# Altium PCB ESP32_RelayControl.pcbdoc (part 1 of 2)
Units mil, origin at the board's own origin, x right, y up, seen from the top; angles counter-clockwise.
Board outline 4712.62 x 5124.54 mil, 4 copper layers (Top Layer, GND, Power, Bottom Layer); 107 components, 102 nets, 393 pads, 226 vias.
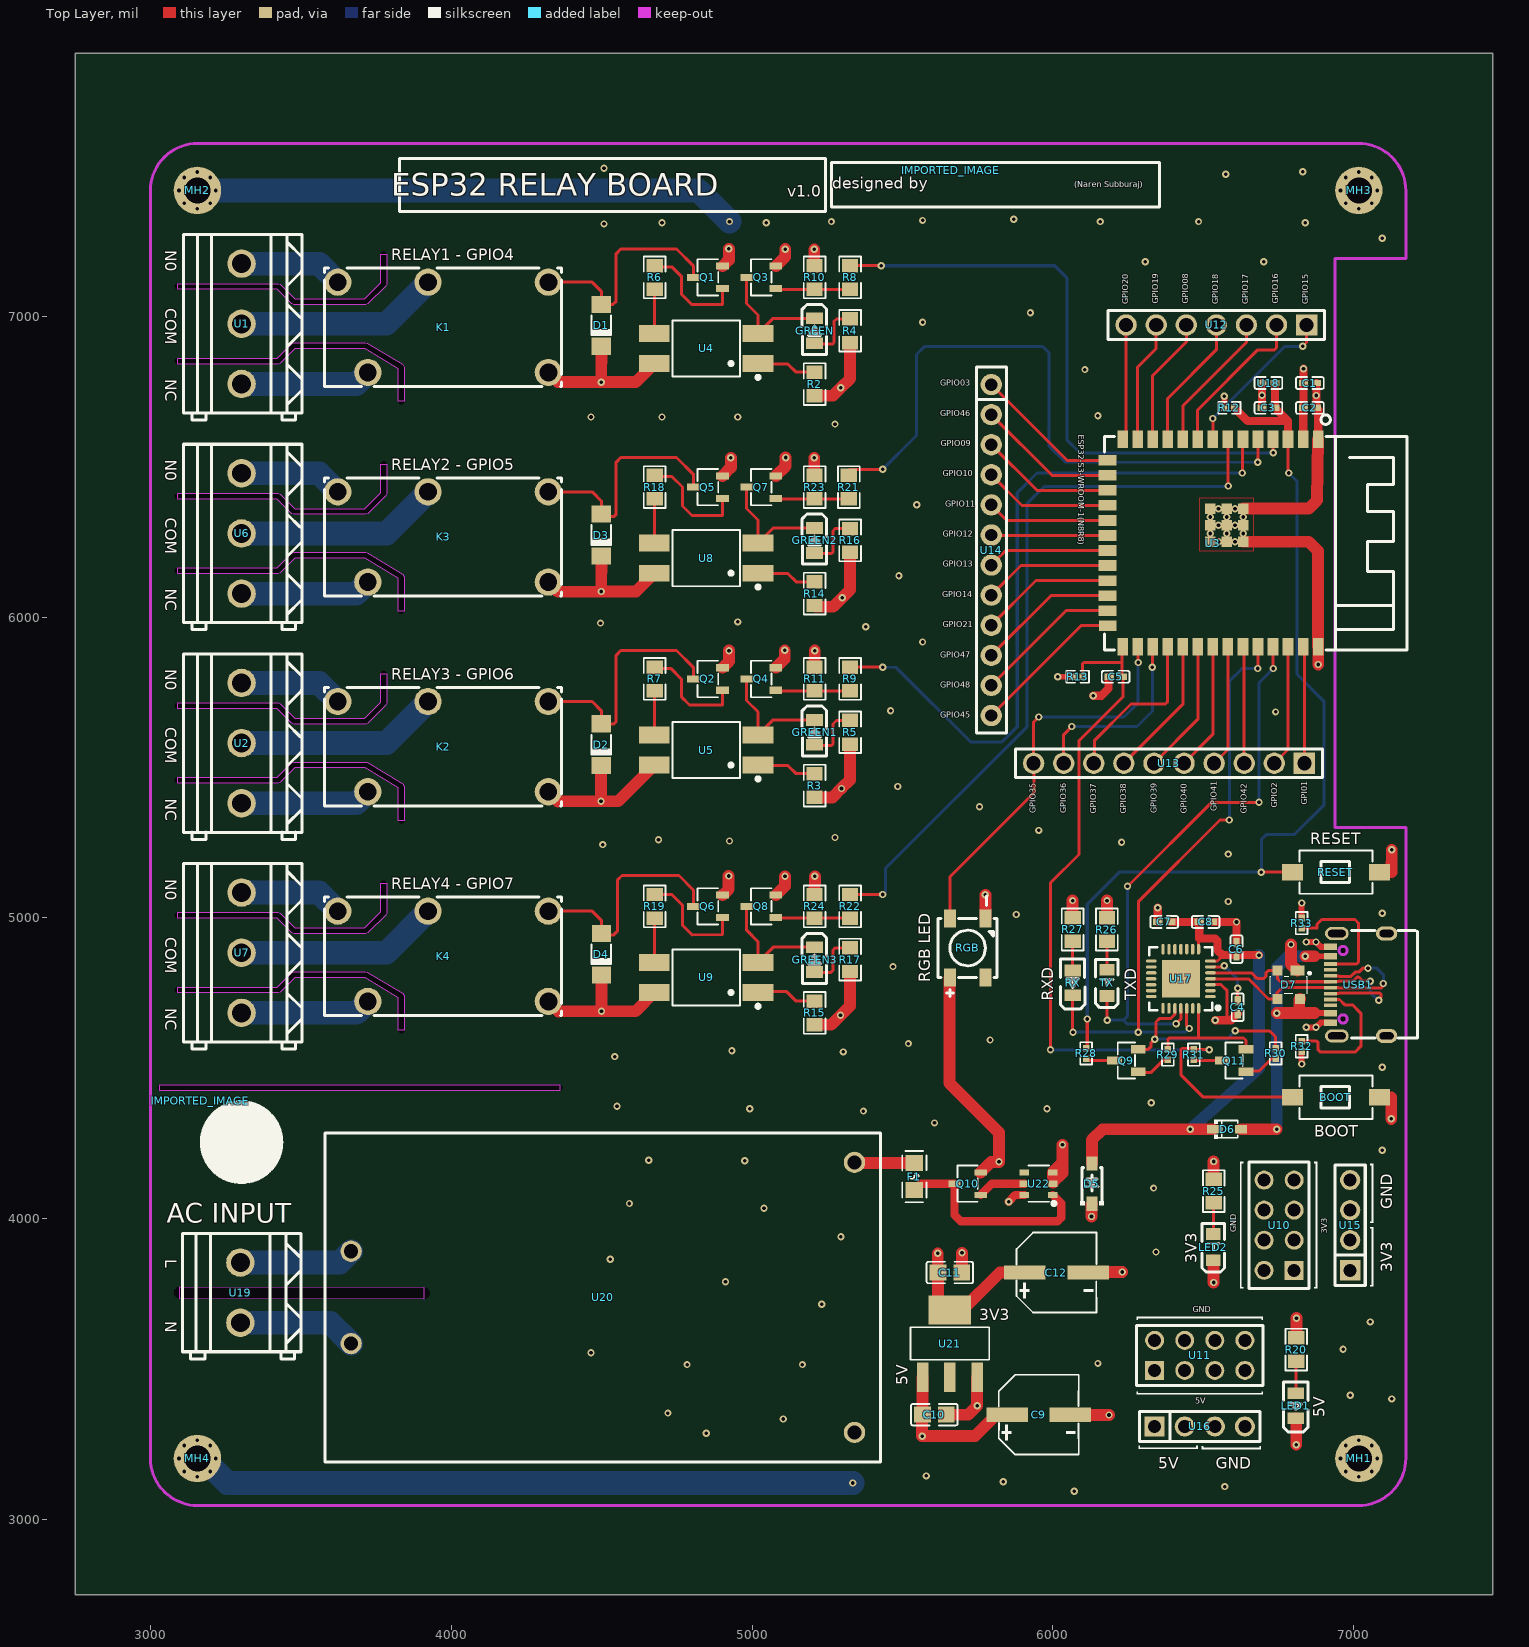
[diagram p0: Top Layer view]
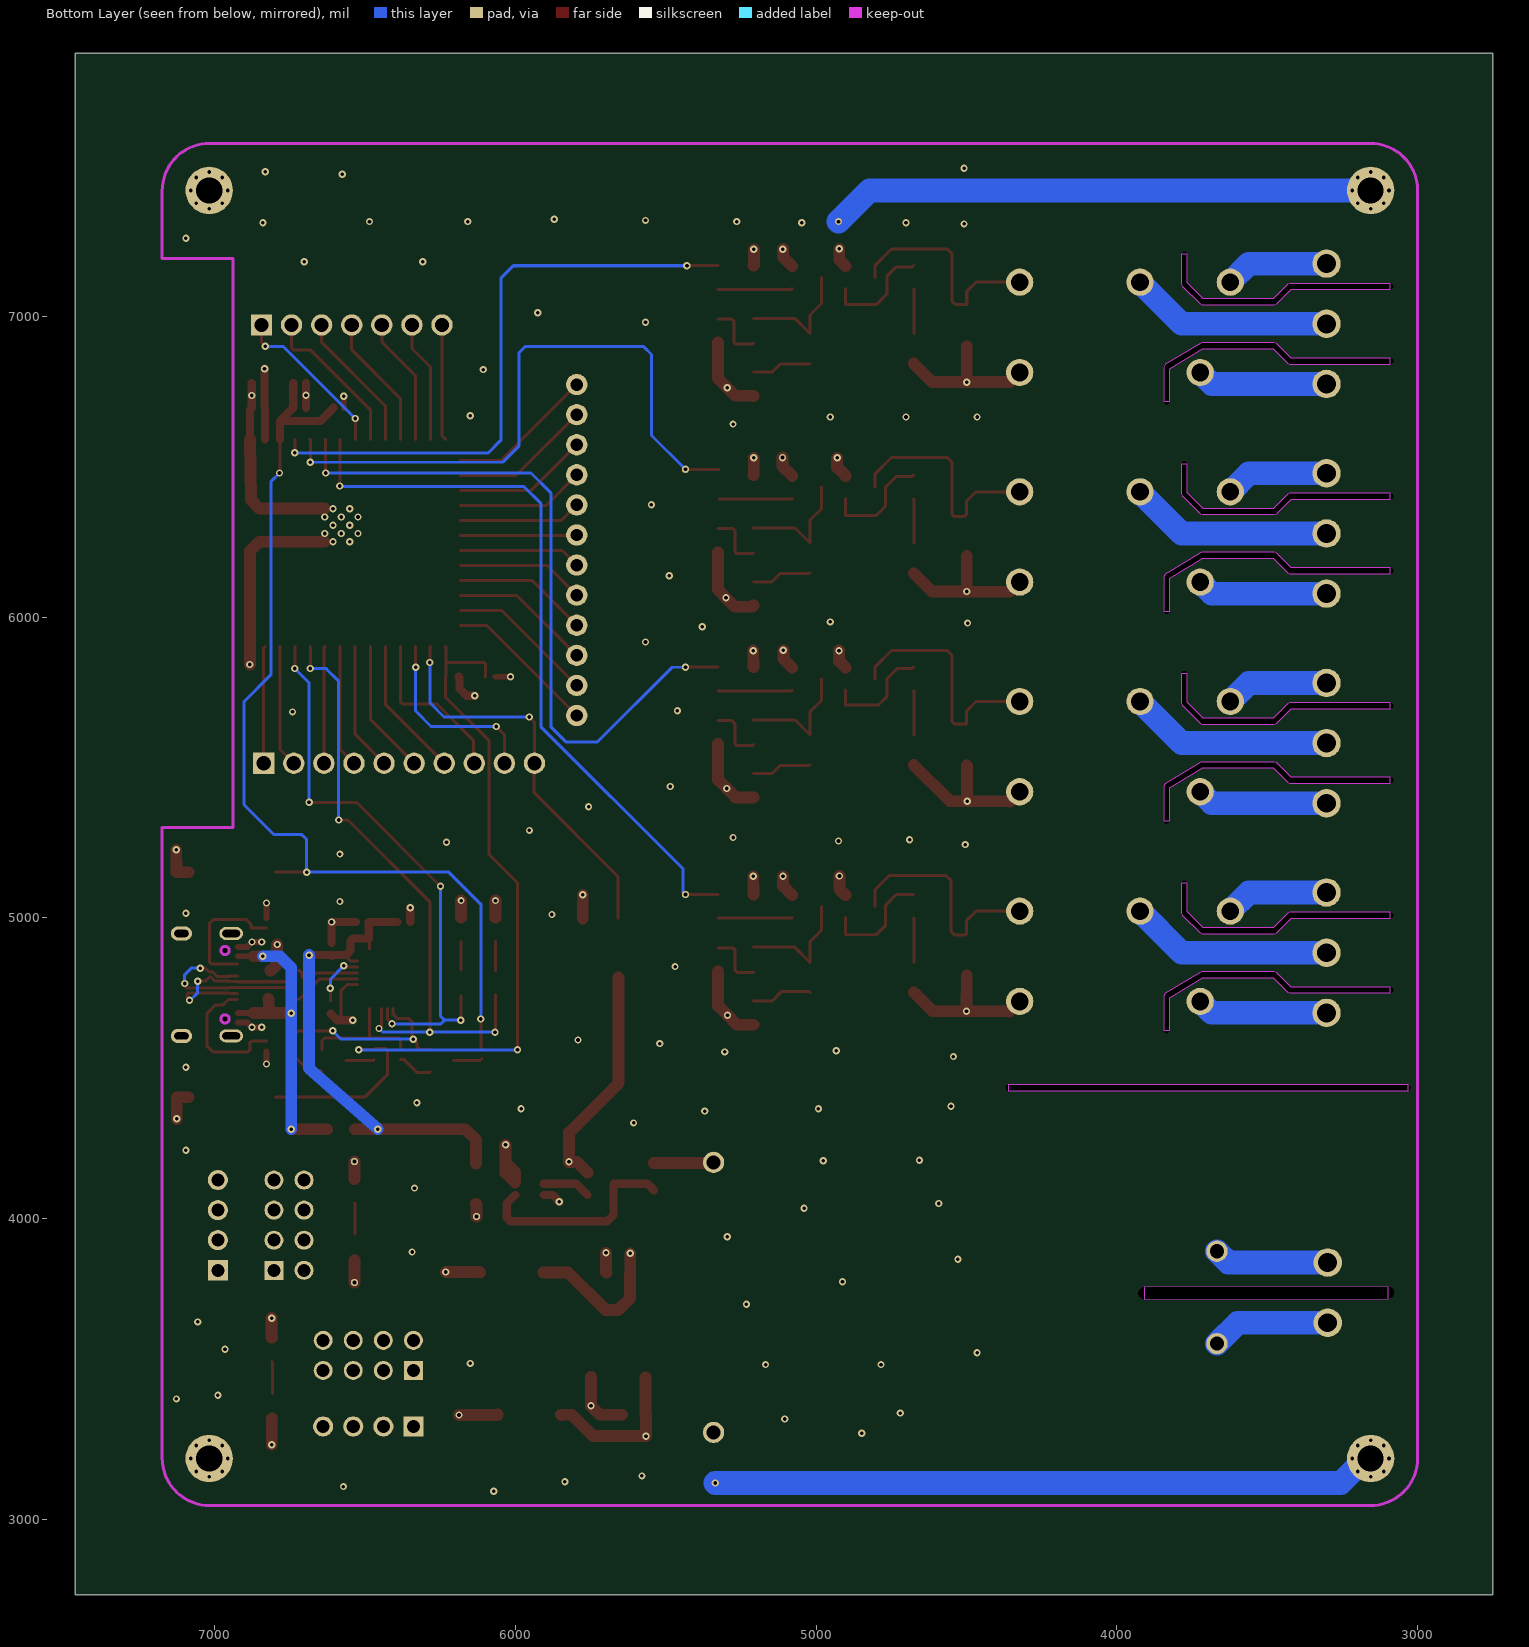
[diagram p1: Bottom Layer view, seen from below]
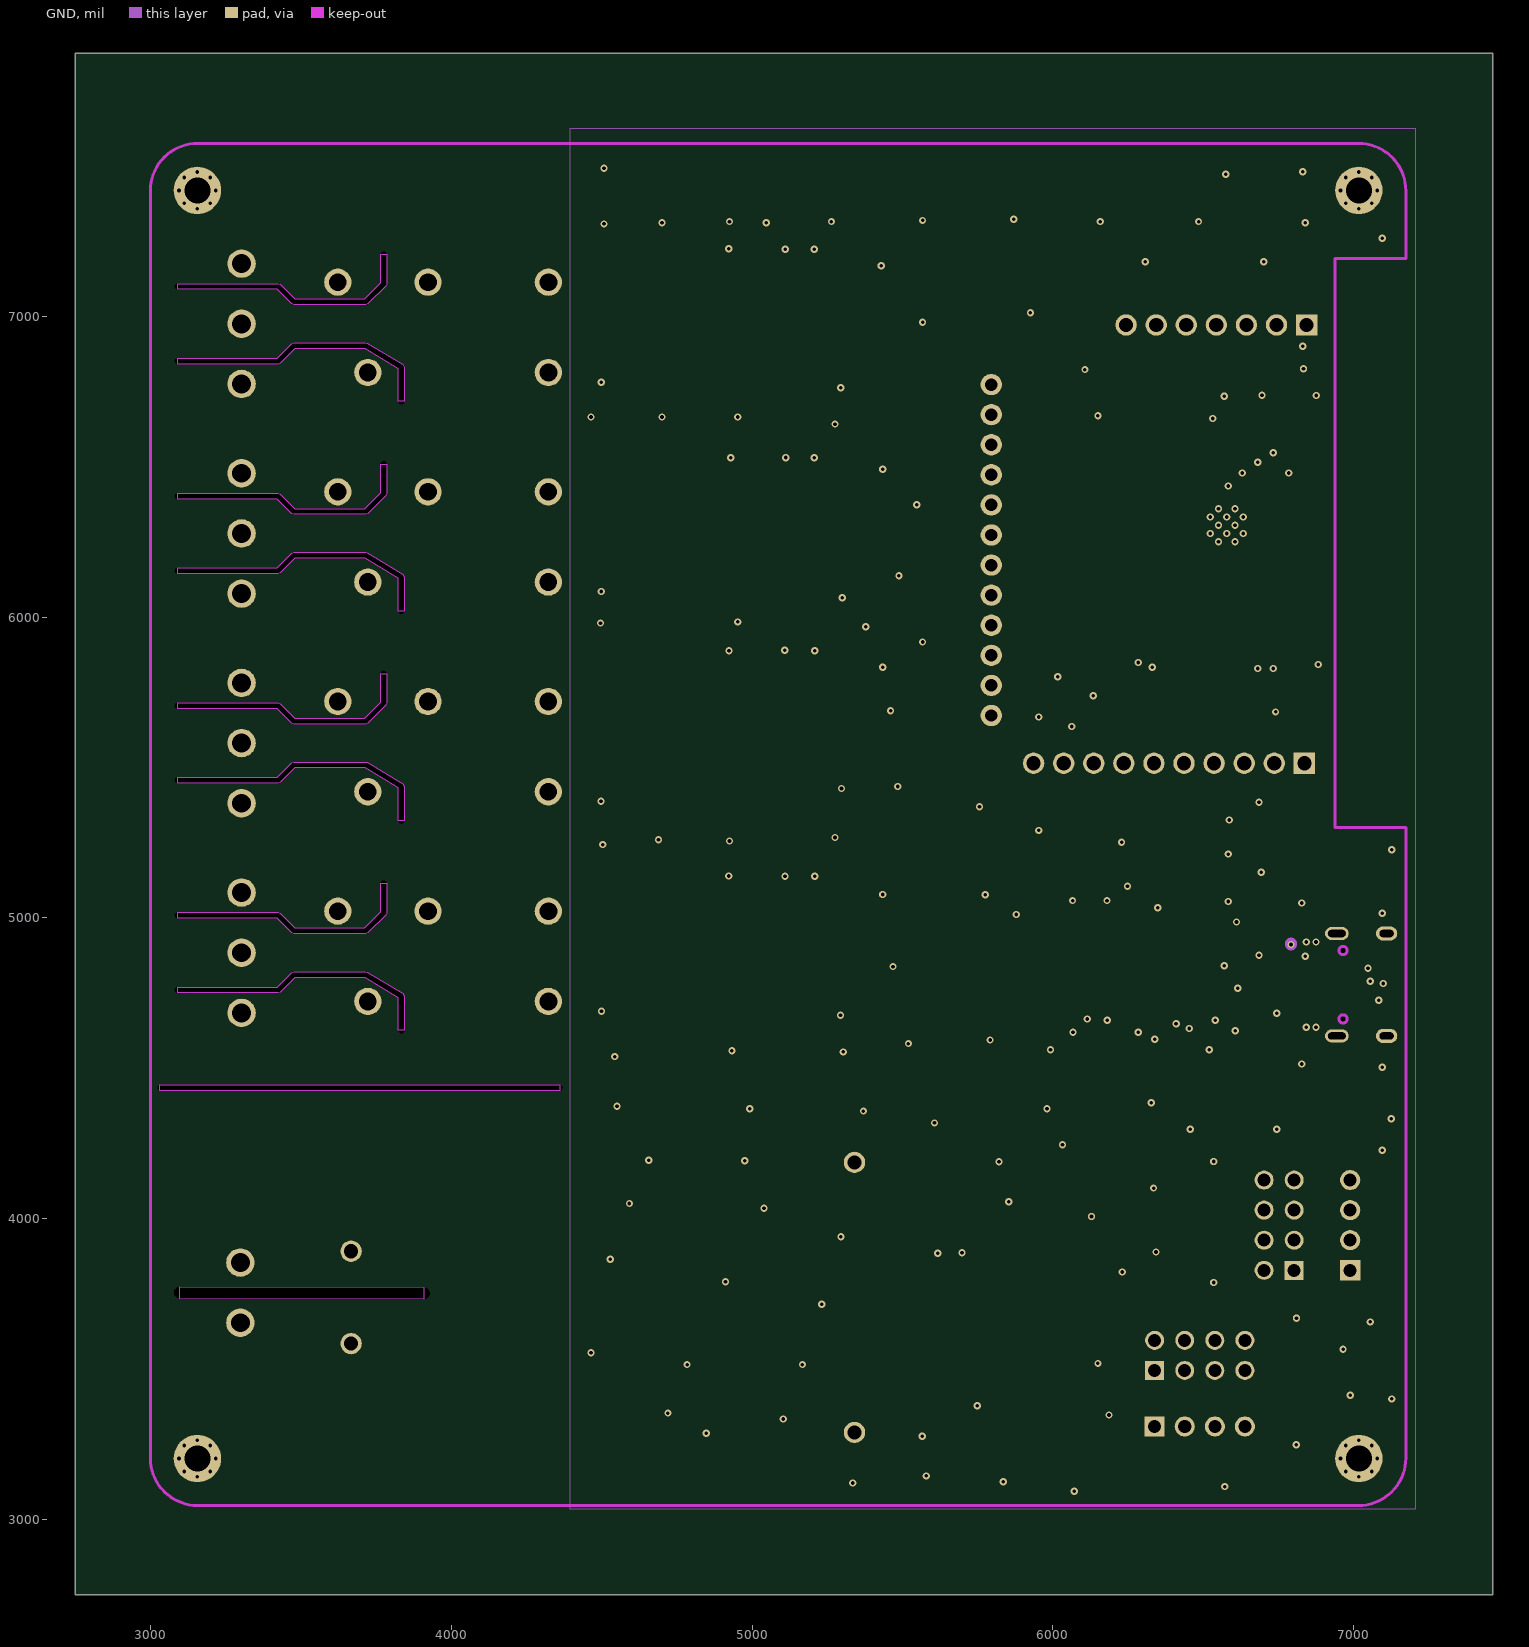
[diagram p2: GND]
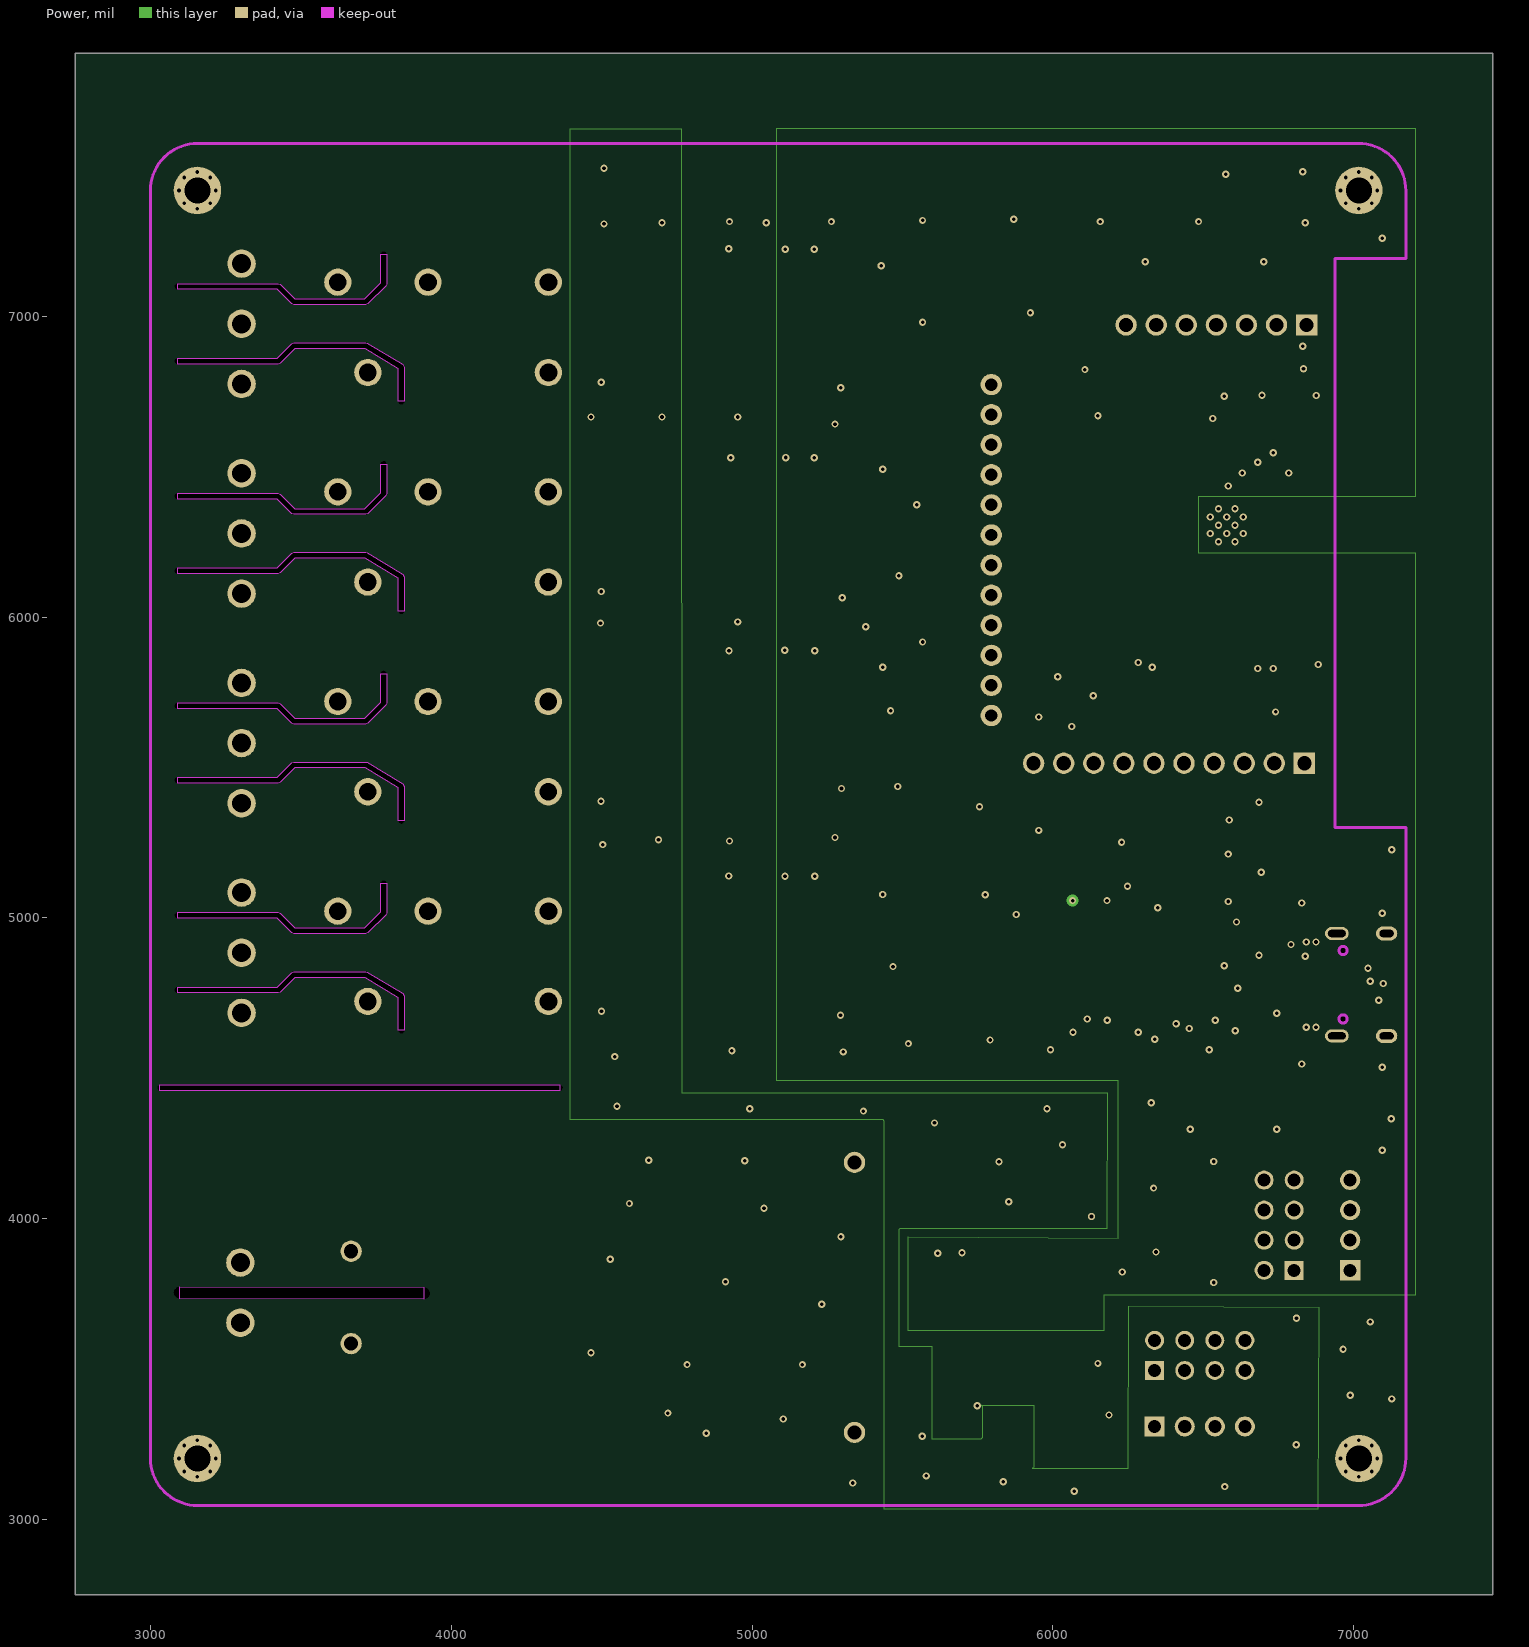
[diagram p3: Power]

## Layer stack, top to bottom
Top Layer: signal copper (thickness not stored)
Dielectric: dielectric 12.6, FR-4, Dk 4.8
GND: signal copper (thickness not stored)
Dielectric: dielectric 12.6, FR-4, Dk 4.8
Power: signal copper (thickness not stored)
Dielectric: dielectric 12.6, FR-4, Dk 4.8
Bottom Layer: signal copper (thickness not stored)

## Board outline
7462.62,2750 2750,2750 2750,7874.54 7462.62,7874.54
cut-out: 3098.22,3774.15 3909.24,3772.18 cw(c3909.19,3752.5) 3909.14,3732.81 3098.12,3734.78 cw(c3098.17,3754.47)
cut-out: 3090.55,6860.76 3421.07,6860.76 3469.39,6909.08 cw(c3476.35,6902.12) 3476.35,6911.96 3716.45,6911.96 cw(c3716.45,6902.12) 3721.51,6910.56 3839.7,6839.69 cw(c3834.64,6831.25) 3844.49,6831.25 3844.49,6717.07 cw(c3834.64,6717.07) 3824.8,6717.07 3824.8,6825.67 3713.73,6892.27 3480.43,6892.27 3432.11,6843.96 cw(c3425.15,6850.92) 3425.15,6841.07 3090.55,6841.07 cw(c3090.65,6850.92)
cut-out: 3090.55,7108.79 3425.15,7108.79 cw(c3425.15,7098.95) 3432.11,7105.91 3480.43,7057.59 3712.37,7057.59 3765.71,7110.92 3765.71,7205.25 cw(c3775.55,7205.15) 3785.39,7205.25 3785.39,7106.85 cw(c3775.55,7106.85) 3782.51,7099.89 3723.41,7040.79 cw(c3716.45,7047.75) 3716.45,7037.9 3476.35,7037.9 cw(c3476.35,7047.75) 3469.39,7040.79 3421.07,7089.1 3090.55,7089.1 cw(c3090.65,7098.95)
cut-out: 3090.55,5715.09 3425.15,5715.09 cw(c3425.15,5705.25) 3432.11,5712.21 3480.43,5663.89 3712.37,5663.89 3765.71,5717.23 3765.71,5811.55 cw(c3775.55,5811.45) 3785.39,5811.55 3785.39,5713.15 cw(c3775.55,5713.15) 3782.51,5706.19 3723.41,5647.09 cw(c3716.45,5654.05) 3716.45,5644.21 3476.35,5644.21 cw(c3476.35,5654.05) 3469.39,5647.09 3421.07,5695.41 3090.55,5695.41 cw(c3090.65,5705.25)
cut-out: 3090.55,5467.06 3421.07,5467.06 3469.39,5515.38 cw(c3476.35,5508.42) 3476.35,5518.26 3716.45,5518.26 cw(c3716.45,5508.42) 3721.51,5516.86 3839.7,5445.99 cw(c3834.64,5437.55) 3844.49,5437.55 3844.49,5323.38 cw(c3834.64,5323.38) 3824.8,5323.38 3824.8,5431.97 3713.73,5498.58 3480.43,5498.58 3432.11,5450.26 cw(c3425.15,5457.22) 3425.15,5447.38 3090.55,5447.38 cw(c3090.65,5457.22)
cut-out: 3090.55,6411.94 3425.15,6411.94 cw(c3425.15,6402.1) 3432.11,6409.06 3480.43,6360.74 3712.37,6360.74 3765.71,6414.08 3765.71,6508.4 cw(c3775.55,6508.3) 3785.39,6508.4 3785.39,6410 cw(c3775.55,6410) 3782.51,6403.04 3723.41,6343.94 cw(c3716.45,6350.9) 3716.45,6341.06 3476.35,6341.06 cw(c3476.35,6350.9) 3469.39,6343.94 3421.07,6392.26 3090.55,6392.26 cw(c3090.65,6402.1)
cut-out: 3090.55,6163.91 3421.07,6163.91 3469.39,6212.23 cw(c3476.35,6205.27) 3476.35,6215.11 3716.45,6215.11 cw(c3716.45,6205.27) 3721.51,6213.71 3839.7,6142.84 cw(c3834.64,6134.4) 3844.49,6134.4 3844.49,6020.23 cw(c3834.64,6020.23) 3824.8,6020.23 3824.8,6128.82 3713.73,6195.42 3480.43,6195.42 3432.11,6147.11 cw(c3425.15,6154.07) 3425.15,6144.22 3090.55,6144.22 cw(c3090.65,6154.07)
cut-out: 3090.55,5018.24 3425.15,5018.24 cw(c3425.15,5008.4) 3432.11,5015.36 3480.43,4967.04 3712.37,4967.04 3765.71,5020.38 3765.71,5114.7 cw(c3775.55,5114.6) 3785.39,5114.7 3785.39,5016.3 cw(c3775.55,5016.3) 3782.51,5009.34 3723.41,4950.24 cw(c3716.45,4957.2) 3716.45,4947.36 3476.35,4947.36 cw(c3476.35,4957.2) 3469.39,4950.24 3421.07,4998.56 3090.55,4998.56 cw(c3090.65,5008.4)
cut-out: 3090.55,4770.21 3421.07,4770.21 3469.39,4818.53 cw(c3476.35,4811.57) 3476.35,4821.41 3716.45,4821.41 cw(c3716.45,4811.57) 3721.51,4820.01 3839.7,4749.14 cw(c3834.64,4740.7) 3844.49,4740.7 3844.49,4626.53 cw(c3834.64,4626.53) 3824.8,4626.53 3824.8,4735.13 3713.73,4801.73 3480.43,4801.73 3432.11,4753.41 cw(c3425.15,4760.37) 3425.15,4750.53 3090.55,4750.53 cw(c3090.65,4760.37)
cut-out: 3031.5,4445.02 4360.28,4445.02 cw(c4360.27,4435.17) 4360.45,4425.33 3031.5,4425.33 cw(c3033.71,4435.17)

## Components (designator, comment, footprint, x,y, rotation, side; value= is the part's Value field where it differs from the comment)
BOOT "TS-1101S-C-B-B-B-A" SW-SMD_L6.0-W3.5-LS8.0 6940.94,4404.07 r180 top
C1 "10uF" C0402 6854.41,6778.1 r180 top
C2 "100nF" C0402 6854.32,6695.4 r180 top
C3 "1uF" C0402 6716.56,6695.43 r0 top
C4 "100nF" C0402 6614.17,4703.24 r90 top
C5 "1uF" C0402 6208.65,5801.71 r180 top
C6 "100nF" C0402 6610.23,4896.15 r270 top
C7 "1uF" C0402 6370.08,4986.7 r0 top
C8 "100nF" C0402 6507.87,4986.7 r180 top
C9 "220uF" CAP-SMD_BD6.3-L6.6-W6.6-LS7.2-FD 5952.75,3348.95 r0 top
C10 "10uF" C0805 5605.9,3348.95 r180 top
C11 "10uF" C0805 5657.48,3821.39 r180 top
C12 "220uF" CAP-SMD_BD6.3-L6.6-W6.6-LS7.2-FD 6011.81,3821.39 r0 top
D1 "FDLL4148" SOD-80_L3.5-W1.5-RD 4499,6969.68 r90 top
D2 "FDLL4148" SOD-80_L3.5-W1.5-RD 4499.03,5575.96 r90 top
D3 "FDLL4148" SOD-80_L3.5-W1.5-RD 4499.03,6272.85 r90 top
D4 "FDLL4148" SOD-80_L3.5-W1.5-RD 4499.06,4879.18 r90 top
D5 "1N5819HW" SOD-123_L2.7-W1.6-LS3.7-RD-1 6129.91,4116.67 r90 top
D6 "B5819WS_C22624" SOD-323_L1.8-W1.3-LS2.5-RD 6578.73,4297.77 r0 top
D7 "SP0503BAHTG_C3040626" SOT-143-4_L2.9-W1.3-P1.92-LS2.4-BL 6783.46,4778.13 r180 top
F1 "BSMD0805-100-6V" F0805 5539.36,4140.29 r270 top
GREEN "SZYY0805YG" LED0805-R-RD_GREEN 5207.66,6951.84 r270 top
GREEN1 "SZYY0805YG" LED0805-R-RD_GREEN 5207.68,5617.16 r270 top
GREEN2 "SZYY0805YG" LED0805-R-RD_GREEN 5207.68,6254.95 r270 top
GREEN3 "SZYY0805YG" LED0805-R-RD_GREEN 5207.69,4861.34 r270 top
IMPORTED_IMAGE "IMPORTED_IMAGE" IMPORTED_IMAGE 5661.21,7486.02 r0 top
IMPORTED_IMAGE "IMPORTED_IMAGE" IMPORTED_IMAGE 3165.36,4392.35 r0 top
K1 "ALQ105" RELAY-TH_ALQ1XX 3972.98,6963.16 r180 top
K2 "ALQ105" RELAY-TH_ALQ1XX 3972.94,5569.46 r180 top
K3 "ALQ105" RELAY-TH_ALQ1XX 3972.94,6266.31 r180 top
K4 "ALQ105" RELAY-TH_ALQ1XX 3972.98,4872.62 r180 top
LED1 "FC-2012HYK-588J" LED0805-R-RD 6807.23,3378.64 r90 top
LED2 "FC-2012YOXK(5)-600H08" LED0805-RD_ORANGE 6533.21,3905.61 r90 top
MH1 "M2-MOUNTING-HOLE" M2-MOUNTING-HOLE 7016.92,3203.29 r0 top
MH2 "M2-MOUNTING-HOLE" M2-MOUNTING-HOLE 3156.3,7418.24 r0 top
MH3 "M2-MOUNTING-HOLE" M2-MOUNTING-HOLE 7016.92,7418.24 r0 top
MH4 "M2-MOUNTING-HOLE" M2-MOUNTING-HOLE 3156.3,3203.29 r0 top
Q1 "MMSS8050-H-TP" SOT-23-3_L2.9-W1.6-P1.90-LS2.8-BR 4853.33,7129.01 r0 top
Q2 "MMSS8050-H-TP" SOT-23-3_L2.9-W1.6-P1.90-LS2.8-BR 4853.33,5794.36 r0 top
Q3 "MMSS8050-H-TP" SOT-23-3_L2.9-W1.6-P1.90-LS2.8-BR 5030.5,7129.01 r0 top
Q4 "MMSS8050-H-TP" SOT-23-3_L2.9-W1.6-P1.90-LS2.8-BR 5030.53,5794.36 r0 top
Q5 "MMSS8050-H-TP" SOT-23-3_L2.9-W1.6-P1.90-LS2.8-BR 4853.33,6432.15 r0 top
Q6 "MMSS8050-H-TP" SOT-23-3_L2.9-W1.6-P1.90-LS2.8-BR 4853.36,5038.5 r0 top
Q7 "MMSS8050-H-TP" SOT-23-3_L2.9-W1.6-P1.90-LS2.8-BR 5030.53,6432.15 r0 top
Q8 "MMSS8050-H-TP" SOT-23-3_L2.9-W1.6-P1.90-LS2.8-BR 5030.56,5038.48 r0 top
Q9 "L8050QLT1G" SOT-23-3_L2.9-W1.3-P1.90-LS2.4-BR 6244.09,4526.09 r0 top
Q10 "FDN306P" SOT-23-3_L3.0-W1.7-P0.95-LS2.9-BR 5716.53,4116.67 r0 top
Q11 "L8050QLT1G" SOT-23-3_L2.9-W1.3-P1.90-LS2.4-BR 6602.35,4526.09 r0 top
R2 "4.7kΩ" R0805 5207.63,6774.7 r270 top
R3 "4.7kΩ" R0805 5207.63,5440.06 r270 top
R4 "2kΩ" R0805 5325.73,6951.8 r270 top
R5 "2kΩ" R0805 5325.73,5617.16 r270 top
R6 "4.7kΩ" R0805 4676.13,7129 r270 top
R7 "4.7kΩ" R0805 4676.13,5794.36 r270 top
R8 "4.7kΩ" R0805 5325.73,7129 r90 top
R9 "4.7kΩ" R0805 5325.73,5794.36 r90 top
R10 "100kΩ" R0805 5207.63,7129 r270 top
R11 "100kΩ" R0805 5207.63,5794.36 r270 top
R12 "10kΩ" R0402 6586.61,6695.4 r180 top
R13 "10kΩ" R0402 6082.67,5801.71 r180 top
R14 "4.7kΩ" R0805 5207.63,6077.85 r270 top
R15 "4.7kΩ" R0805 5207.66,4684.18 r270 top
R16 "2kΩ" R0805 5325.73,6254.95 r270 top
R17 "2kΩ" R0805 5325.76,4861.38 r270 top
R18 "4.7kΩ" R0805 4676.13,6432.15 r270 top
R19 "4.7kΩ" R0805 4676.16,5038.48 r270 top
R20 "340Ω" R0805 6808.76,3565.21 r270 top
R21 "4.7kΩ" R0805 5321.83,6432.15 r90 top
R22 "4.7kΩ" R0805 5325.76,5038.48 r90 top
R23 "100kΩ" R0805 5207.63,6432.15 r270 top
R24 "100kΩ" R0805 5207.66,5038.48 r270 top
R25 "147Ω" R0805 6534.68,4092.17 r270 top
R26 "1kΩ" R0805 6179.69,4961.56 r270 top
R27 "1kΩ" R0805 6065.5,4961.6 r270 top
R28 "0Ω" R0402 6110.23,4549.74 r90 top
R29 "10kΩ" R0402 6381.88,4545.8 r270 top
R30 "10kΩ" R0402 6740.15,4549.79 r270 top
R31 "0Ω" R0402 6468.5,4545.8 r90 top
R32 "5.1kΩ" R0402 6826.76,4573.36 r90 top
R33 "5.1kΩ" R0402 6826.76,4982.81 r270 top
RESET "TS-1101S-C-B-B-B-A" SW-SMD_L6.0-W3.5-LS8.0 6940.94,5152.1 r180 top
RGB "XL-5050RGBC-WS2812B" LED-SMD_4P-L5.0-W5.0-BL_XL-5050RGBC 5716.53,4900.13 r0 top
RX "SZYY0805YG" LED0805-R-RD_GREEN 6065.51,4784.4 r90 top
TX "17-215SURC/S530-A2/TR8(TY)" LED0805-RD_RED 6179.71,4784.36 r90 top
U1 "DB128L-5.08-3P-BK-S" CONN-TH_3P-P5.08_DB128L-5.08-3P-BK-S 3303.15,6974.93 r90 top
U2 "DB128L-5.08-3P-BK-S" CONN-TH_3P-P5.08_DB128L-5.08-3P-BK-S 3303.15,5581.23 r90 top
U3 "ESP32-S3-WROOM-1(N8R8)" WIRELM-SMD_ESP32-S3-WROOM-1 6531.49,6246.28 r270 top
U4 "CYPC817(C-TP2)" SOP-4_L6.4-W4.6-P2.54-LS10.2-TL 4847.42,6892.8 r180 top
U5 "CYPC817(C-TP2)" SOP-4_L6.4-W4.6-P2.54-LS10.2-TL 4847.42,5558.16 r180 top
U6 "DB128L-5.08-3P-BK-S" CONN-TH_3P-P5.08_DB128L-5.08-3P-BK-S 3303.15,6278.08 r90 top
U7 "DB128L-5.08-3P-BK-S" CONN-TH_3P-P5.08_DB128L-5.08-3P-BK-S 3303.15,4884.38 r90 top
U8 "CYPC817(C-TP2)" SOP-4_L6.4-W4.6-P2.54-LS10.2-TL 4847.42,6195.95 r180 top
U9 "CYPC817(C-TP2)" SOP-4_L6.4-W4.6-P2.54-LS10.2-TL 4847.42,4802.26 r180 top
U10 "ZX-PM2.54-2-4PY" HDR-TH_8P-P2.54-V-F-R2-C4-S2.54 6751.88,3978.87 r90 top
U11 "ZX-PM2.54-2-4PY" HDR-TH_8P-P2.54-V-F-R2-C4-S2.54 6488.18,3545.88 r0 top
U12 "A2541HWV-7P" HDR-TH_7P-P2.54-V_A2541HWV-7P 6543.3,6970.99 r180 top
U13 "A2541HWV-10P" HDR-TH_10P-P2.54-V-F-1 6385.82,5514.3 r180 top
U14 "ZX-PM2.54-1-12PY" HDR-TH_12P-P2.54-V-F 5795.3,6222.91 r270 top
U15 "HB-PH3-25414PB2GOP" HDR-TH_4P-P2.54-V-M 6988.2,3978.91 r90 top
U16 "HB-PH3-25414PB2GOP" HDR-TH_4P-P2.54-V-M 6488.2,3309.61 r0 top
U17 "CP2102-GMR" WQFN-28_L5.0-W5.0-P0.50-BL-EP3.2 6425.16,4797.75 r90 top
U18 "4.7uF" C0402 6716.6,6778.11 r0 top
U19 "DB128L-5.08-2P-BK-S" CONN-TH_2P-P5.08_DB128L-5.08-2P-BK-S 3299.22,3754.51 r90 top
U20 "HLK-10M05" PWRM-TH_HLK-10M05 4503.93,3738.72 r0 top
U21 "AMS1117-3.3_C347222" SOT-223-4_L6.5-W3.5-P2.30-LS7.0-BR 5657.5,3585.21 r270 top
U22 "LTC4412HVIS6#TRPBF" TSOT-23-6_L2.9-W1.6-P0.95-LS2.8-BR 5952.7,4116.71 r0 top
USB1 "TYPE-C 16PIN 2MD(073)" USB-C-SMD_TYPE-C-6PIN-2MD-073 7015.74,4778.09 r90 top

## Footprints (in the part's own frame and the unit in brackets; to place one, negate y for a bottom-side part, rotate by r counter-clockwise, add the part's x,y. Pads: shape width x height; smd on the part's side, far side on the other; paste and mask are expansions set on the pad)
C0402 [mm]
  rect 0.79x0.54 smd: 1(-0.545,0) 2(0.545,0)
  silkscreen extent -1.17,-0.5 1.17,0.5
C0805 [mm]
  rect 1.41x1.35 smd: 1(-1,0) 2(1,0)
  silkscreen extent -1.96,-0.9 1.96,0.9
CAP-SMD_BD6.3-L6.6-W6.6-LS7.2-FD [mm]
  rect 3.5x1.2 smd: 1(-2.67,0) 2(2.67,0)
  silkscreen extent -3.38,-3.38 3.38,3.38
CONN-TH_2P-P5.08_DB128L-5.08-2P-BK-S [mm]
  round 2.4 hole 1.6: 1(-2.54,0) 2(2.54,0)
  silkscreen extent -5.59,-5.1 4.99,4.9
CONN-TH_3P-P5.08_DB128L-5.08-3P-BK-S [mm]
  round 2.4 hole 1.6: 1(-5.08,0) 2(0,0) 3(5.08,0)
  silkscreen extent -8.13,-5.1 7.53,4.9
F0805 [mm]
  rect 1.335x1.5 smd: 1(-1.143,0) 2(1.142,0)
  silkscreen extent -2.16,-1.02 2.16,1.02
HDR-TH_4P-P2.54-V-M [mm]
  rect 1.7x1.7 hole 1.1: 1(-3.81,0)
  round 1.7 hole 1.1: 2(-1.27,0) 3(1.27,0) 4(3.81,0)
  silkscreen extent -5.08,-1.27 5.08,1.27
HDR-TH_7P-P2.54-V_A2541HWV-7P [mm]
  rect 1.8x1.8 hole 1.2: 1(-7.62,0)
  round 1.8 hole 1.2: 2(-5.08,0) 3(-2.54,0) 4(0,0) 5(2.54,0) 6(5.08,0) 7(7.62,0)
  silkscreen extent -9.14,-1.22 9.14,1.22
HDR-TH_8P-P2.54-V-F-R2-C4-S2.54 [mil]
  rect 62.99x62.99 hole 43.31: 1(-150,-50)
  round 62.99 hole 43.31: 2(-150,50) 3(-50,-50) 4(-50,50) 5(50,-50) 6(50,50) 7(150,-50) 8(150,50)
  silkscreen extent -210,-100 210,100
HDR-TH_10P-P2.54-V-F-1 [mm]
  rect 1.8x1.8 hole 1.2: 1(-11.43,0)
  round 1.8 hole 1.2: 2(-8.89,0) 3(-6.35,0) 4(-3.81,0) 5(-1.27,0) 6(1.27,0) 7(3.81,0) 8(6.35,0) 9(8.89,0) 10(11.43,0)
  silkscreen extent -12.95,-1.22 12.95,1.22
HDR-TH_12P-P2.54-V-F [mm]
  round 1.8 hole 1.05: 1(-13.97,0) 2(-11.43,0) 3(-8.89,0) 4(-6.35,0) 5(-3.81,0) 6(-1.27,0) 7(1.27,0) 8(3.81,0) 9(6.35,0) 10(8.89,0) 11(11.43,0) 12(13.97,0)
  silkscreen extent -15.45,-1.27 15.45,1.27
IMPORTED_IMAGE [mil]
LED0805-R-RD [mm]
  rect 1x1.4 smd: 1(1.05,0) 2(-1.05,0)
  silkscreen extent -2.22,-1.04 1.99,1.01
LED0805-R-RD_GREEN [mm]
  rect 1x1.4 smd: 1(1.05,0) 2(-1.05,0)
  silkscreen extent -2.22,-1.04 1.99,1.01
LED0805-RD_ORANGE [mm]
  rect 1x1.25 smd: 1(-1.1,0) 2(1.1,0)
  silkscreen extent -2.1,-0.95 1.98,0.96
LED0805-RD_RED [mm]
  rect 1x1.25 smd: 1(-1.1,0) 2(1.1,0)
  silkscreen extent -2.1,-0.95 1.98,0.96
LED-SMD_4P-L5.0-W5.0-BL_XL-5050RGBC [mm]
  rect 1x1.5 smd: 1(-1.5,-2.5) 2(1.5,-2.5) 3(1.5,2.5) 4(-1.5,2.5)
  silkscreen extent -2.5,-4.1 2.5,4.4
M2-MOUNTING-HOLE [mm]
  round 4 hole 2.2: 1(0,-0.001)
PWRM-TH_HLK-10M05 [mm]
  round 1.8 hole 1.2: 1(-21.25,3.9) 2(-21.25,-3.9) 3(21.25,11.4) 4(21.25,-11.4)
  silkscreen extent -23.45,-13.9 23.45,13.9
R0402 [mm]
  rect 0.566x0.54 smd: 1(-0.433,0) 2(0.433,0)
  silkscreen extent -0.94,-0.5 0.94,0.5
R0805 [mil]
  rect 44.59x54.21 smd: 1(-39.37,0) 2(39.37,0)
  silkscreen extent -69,-36 69,36
RELAY-TH_ALQ1XX [mm]
  round 2.3 hole 1.5 copper offset 0,0: 1(-8.89,-3.81) 2(1.27,-3.81) 3(8.89,-3.81) 4(6.35,3.81) 5(-8.89,3.81)
  silkscreen extent -10,-5 10,5
SOD-80_L3.5-W1.5-RD [mm]
  rect 1.44x1.62 smd: 1(-1.765,0) 2(1.765,0)
  silkscreen extent -0.84,-0.83 0.84,0.83
SOD-123_L2.7-W1.6-LS3.7-RD-1 [mm]
  rect 1.2x0.95 smd: 1(-1.7,0) 2(1.7,0)
  silkscreen extent -1.81,-0.98 1.35,0.98
SOD-323_L1.8-W1.3-LS2.5-RD [mm]
  rect 1x0.75 smd: 1(-1.173,0) 2(1.173,0)
  silkscreen extent -1.08,-0.8 0.9,0.8
SOP-4_L6.4-W4.6-P2.54-LS10.2-TL [mil]
  rect 102.36x56 smd: 1(-172.44,50) 2(-172.44,-50) 3(172.44,-50) 4(172.44,50)
  silkscreen extent -178,-93 112,102
SOT-23-3_L2.9-W1.3-P1.90-LS2.4-BR [mm]
  rect 1.25x0.7 smd: 1(1,-0.95) 2(1,0.95) 3(-1,0)
  silkscreen extent -0.73,-1.53 0.73,1.53
SOT-23-3_L2.9-W1.6-P1.90-LS2.8-BR [mm]
  rect 1.07x0.6 smd: 1(1.235,-0.95) 2(1.235,0.95) 3(-1.235,0)
  silkscreen extent -0.88,-1.54 0.88,1.54
SOT-23-3_L3.0-W1.7-P0.95-LS2.9-BR [mil]
  rect 40.85x20.95 smd: 1(43.36,-37.4) 2(43.36,37.41) 3(-43.36,-0.01)
  silkscreen extent -34,-60 34,60
SOT-143-4_L2.9-W1.3-P1.92-LS2.4-BL [mil]
  rect 47x33 smd: 1(-29.53,-46.9)
  rect 33x33 smd: 2(37.4,-46.9) 3(37.4,46.91) 4(-37.4,46.91)
  silkscreen extent -74,-42 61,30
SOT-223-4_L6.5-W3.5-P2.30-LS7.0-BR [mm]
  rect 2.47x0.98 smd: 1(2.835,-2.3) 2(2.835,0) 3(2.835,2.3)
  rect 2.47x3.6 smd: 4(-2.835,0)
  silkscreen extent -1.37,-3.33 1.37,3.33
SW-SMD_L6.0-W3.5-LS8.0 [mm]
  rect 1.74x1.4 smd: 1(-3.67,0) 2(3.67,0)
  silkscreen extent -3.08,-1.83 3.08,1.83
TSOT-23-6_L2.9-W1.6-P0.95-LS2.8-BR [mm]
  rect 0.8x0.532 smd: 1(1.2,-0.95) 2(1.2,0) 3(1.2,0.95) 4(-1.2,0.95) 5(-1.2,0) 6(-1.2,-0.95)
  silkscreen extent -0.88,-1.82 1.44,1.53
USB-C-SMD_TYPE-C-6PIN-2MD-073 [mm]
  rect 0.55x1.1 smd: 1(-3.2,2.375) 2(-2.4,2.375) 11(2.4,2.375) 12(3.2,2.375)
  rect 0.3x1.1 smd: 3(-1.75,2.375) 4(-1.25,2.375) 5(-0.75,2.375) 6(-0.25,2.375) 7(0.25,2.375) 8(0.75,2.375) 9(1.25,2.375) 10(1.75,2.375)
  oval 1.1x2 hole 0.6 slot 1.5 at 90 deg: 13(-4.325,1.825)
  oval 1.1x2 hole 0.6 slot 1.5 at 90 deg copper offset 0,0: 14(4.325,1.825)
  oval 1.2x1.8 hole 0.6 slot 1.2 at 90 deg copper offset 0,0: 15(-4.325,-2.375) 16(4.325,-2.375)
  Multi-Layer board cut-out: -2.89,0.955 -2.738,0.989 -2.616,1.087 -2.549,1.227 -2.549,1.383 -2.616,1.523 -2.738,1.62 -2.89,1.655 -2.89,1.655 -3.042,1.62 -3.164,1.523 -3.231,1.383 -3.231,1.227 -3.164,1.087 -3.042,0.989 -2.89,0.955
  Multi-Layer board cut-out: 2.89,0.955 3.042,0.989 3.164,1.087 3.231,1.227 3.231,1.383 3.164,1.523 3.042,1.62 2.89,1.655 2.89,1.655 2.738,1.62 2.616,1.523 2.549,1.383 2.549,1.227 2.616,1.087 2.738,0.989 2.89,0.955
  silkscreen extent -4.5,-4.97 4.57,0.6
WIRELM-SMD_ESP32-S3-WROOM-1 [mm]
  rect 1.5x0.9 smd: 1(-8.75,8.895) 2(-8.75,7.625) 3(-8.75,6.355) 4(-8.75,5.085) 5(-8.75,3.815) 6(-8.75,2.545) 7(-8.75,1.275) 8(-8.75,0.005) 9(-8.75,-1.265) 10(-8.75,-2.535) 11(-8.75,-3.805) 12(-8.75,-5.075) 13(-8.75,-6.345) 14(-8.75,-7.615) 27(8.75,-7.615) 28(8.75,-6.345) 29(8.75,-5.075) 30(8.75,-3.805) 31(8.75,-2.535) 32(8.75,-1.265) 33(8.75,0.005) 34(8.75,1.275) 35(8.75,2.545) 36(8.75,3.815) 37(8.75,5.085) 38(8.75,6.355) 39(8.75,7.625) 40(8.75,8.895)
  rect 0.9x1.5 smd: 15(-6.985,-8.895) 16(-5.715,-8.895) 17(-4.445,-8.895) 18(-3.175,-8.895) 19(-1.905,-8.895) 20(-0.635,-8.895) 21(0.635,-8.895) 22(1.905,-8.895) 23(3.175,-8.895) 24(4.445,-8.895) 25(5.715,-8.895) 26(6.985,-8.865)
  rect 0.9x0.9 smd: 41(-0.1,-0.225) 42(-1.5,-0.225) 43(-2.9,-0.225) 44(-2.9,2.575) 45(-1.5,2.575) 46(-0.1,2.575) 47(-0.1,1.175) 48(-2.9,1.175) 49(-1.5,1.175)
  silkscreen extent -10.82,-9.14 9.02,16.39
WQFN-28_L5.0-W5.0-P0.50-BL-EP3.2 [mm]
  oval 0.28x0.9 smd: 1(-1.501,-2.5) 2(-1.001,-2.5) 3(-0.501,-2.5) 4(0,-2.5) 5(0.5,-2.5) 6(1.001,-2.5) 7(1.501,-2.5) 15(1.501,2.5) 16(1.001,2.5) 17(0.5,2.5) 18(0,2.5) 19(-0.501,2.5) 20(-1.001,2.5) 21(-1.501,2.5)
  oval 0.9x0.28 smd: 8(2.5,-1.501) 9(2.5,-1.001) 10(2.5,-0.501) 11(2.5,0) 12(2.5,0.5) 13(2.5,1.001) 14(2.5,1.501) 22(-2.5,1.501) 23(-2.5,1.001) 24(-2.5,0.5) 25(-2.5,0) 26(-2.5,-0.501) 27(-2.5,-1.001) 28(-2.5,-1.501)
  rect 3.2x3.2 smd: 29(0,0)
  silkscreen extent -2.65,-3.3 2.65,2.65

## Free pads (board coordinates)
  round 24.41 hole 12.2: ""(5429.13,7167.84) ""(5434.04,5077.84) ""(5434.04,5833.75) ""(5434.04,6491.23) ""(5565.35,3277.69) ""(6015.74,5801.7) ""(6128.34,4007.61) ""(6534.25,3788.32) ""(6534.25,4190.29) ""(6569.68,6734.38) ""(6809.05,3248.95) ""(6809.44,3669.81) ""(6832.95,6825.32)

## Via types
v1: diameter 24.41, hole 12.2, Top Layer to Bottom Layer, 140 vias
v2: diameter 24.02, hole 12.01, Top Layer to Bottom Layer, 86 vias

## Nets (pads, with @x,y where several pads share a name; then routed paths per layer and width w, separated by ;. In a path a pad name is that pad's centre, name@x,y a point inside that pad or via, vN(x,y) a via of type N, cw(c..) or ccw(c..) an arc to the next point about the centre after c; other vN are vias at no path point)
3V3: C1.2 C2.2 C11.2 C12.1 pad.@6015.74,5801.7 pad.@6534.25,4190.29 pad.@6569.68,6734.38 pad.@6832.95,6825.32 R2.2 R3.2 R4.2 R5.2 R12.2 R13.2 R14.2 R15.2 R16.2 R17.2 R25.1 R26.1 R27.1 U3.2 U10.1 U10.3 U10.5 U10.7 U15.1 U15.2 U21.4 | length 2050.9
  Top Layer w19.68: v1(6015.74,5801.7) R13.2@6065.63,5801.71 ; R12.2@6569.56,6695.4 6569.68,6695.52 v1(6569.68,6734.38)
  Top Layer w27.56: U3.2@6831.68,6590.77 6831.68,6694.22 C2.2@6832.87,6695.4 ; C2.2@6832.87,6695.4 C1.2@6832.9,6778.11 ; C1.2@6832.95,6778.1 v1(6832.95,6825.32)
  Top Layer w39.37: R15.2@5207.65,4644.76 5262.75,4644.76 v1(5294.19,4676.2) 5325.75,4707.76 R17.2@5325.76,4822.01 ; R3.2@5207.63,5400.69 5267.5,5400.68 v1(5297.24,5430.42) 5325.73,5458.91 R5.2@5325.73,5577.79 ; R14.2@5207.63,6038.48 5211.58,6034.54 5269.48,6034.54 v1(5299.39,6064.45) 5325.73,6090.79 R16.2@5325.73,6215.58 ; R2.2@5207.65,6735.36 5268.65,6735.76 v1(5295.27,6762.33) 5325.75,6792.76 R4.2@5325.75,6912.46 ; v1(5617.32,3885.17) 5617.32,3822.18 C11.2@5618.1,3821.39 5618.1,3736.22 U21.4@5657.5,3696.82 5699.44,3696.82 5824.01,3821.39 C12.1@5906.69,3821.39 ; R27.1@6065.5,5000.98 v2(6065.5,5057.61) ; R26.1@6179.69,5000.94 v2(6179.69,5057.61) ; v1(6534.25,4190.29) 6534.24,4131.97 R25.1@6534.68,4131.54
  Power w39.37: v2(6065.5,5057.61) v2@6065.74,5057.61
+5V: C9.1 C10.2 D1.1 D2.1 D3.1 D4.1 D5.1 K1.5 K2.5 K3.5 K4.5 pad.@5565.35,3277.69 pad.@6128.34,4007.61 pad.@6809.44,3669.81 Q10.2 R20.1 RGB.1 U4.4 U5.4 U8.4 U9.4 U11.1 U11.3 U11.5 U11.7 U16.1 U16.2 U21.1 U22.6 | length 3500.1
  Top Layer w27.56: v1(5853.54,4056.82) 5853.54,4057.22 5874.8,4078.48 U22.6@5905.46,4079.31
  Top Layer w39.37: K4.5@4322.98,4722.62 4356.09,4689.5 v1(4499.79,4690.05) 4612.78,4690.05 U9.4@4674.98,4752.25 ; K2.5@4322.94,5419.46 4355.27,5387.14 v1(4497.82,5387.68) ; K3.5@4322.94,6116.31 4354.86,6084.38 v1(4499,6084.93) 4613.96,6084.93 U8.4@4674.98,6145.95 ; K1.5@4322.98,6813.16 4355.53,6780.6 ; 4355.53,6780.99 v1(4499,6780.99) ; v1@4498.95,6084.96 D3.1@4499.03,6203.36 ; D1.1@4499,6900.19 v1(4499,6780.99) ; D4.1@4499.05,4809.66 v1@4499.75,4690.06 ; D2.1@4499.03,5506.47 4497.81,5505.26 v1(4497.82,5387.68) ; U5.4@4674.98,5508.16 4554.51,5387.69 v1(4497.82,5387.68) ; U4.4@4674.98,6842.8 4613.17,6780.99 v1(4499,6780.99) ; U21.1@5566.9,3473.22 5566.5,3348.53 5565.35,3347.38 5565.35,3277.71 5740.61,3277.71 ; RGB.1@5657.48,4801.7 5656.29,4800.52 5656.29,4450.92 5820.86,4286.35 v1(5820.86,4189.11) 5794.93,4189.11 Q10.2@5759.89,4154.07 ; 5740.61,3277.32 C9.1@5812.2,3348.91 ; C9.1@5812.2,3348.52 5847.59,3348.52 C9.1@5846.84,3347.77 ; v1(6128.34,4007.61) 6128.34,4048.16 D5.1@6129.92,4049.73 ; R20.1@6808.76,3604.58 6809.44,3605.27 v1(6809.44,3669.81)
  other v1: 5565.35,3277.69
CC1: R32.2 USB1.4 | length 464.4
  Top Layer w10: R32.2@6826.76,4590.41 6876.65,4590.4 6881.88,4585.17 6881.88,4561.55 6889.76,4553.68 7003.93,4553.68 7023.61,4573.36 7023.61,4683.6 6996.06,4711.16 6970.48,4711.16 6952.75,4728.88 USB1.4@6922.23,4728.88
CC2: R33.2 USB1.10 | length 438.6
  Top Layer w10: R33.2@6826.76,4965.76 6876.65,4965.77 6877.94,4967.06 6877.94,4978.87 6893.69,4994.62 7003.93,4994.62 7015.74,4982.81 7015.74,4852.89 7009.85,4846.99 USB1.10@6922.23,4846.99
D2_2: D2.2 K2.1 Q2.3 | length 830
  Top Layer w10: K2.1@4322.94,5719.46 4468.5,5719.46 4499.03,5688.93 D2.2@4499.03,5645.45 4540.35,5644.73 4548.25,5652.63 4548.25,5873.13 4563.95,5888.83 4748.95,5888.83 4804.75,5833.13 Q2.3@4804.75,5794.33
D3_2: D3.2 K3.1 Q5.3 | length 790.2
  Top Layer w10: K3.1@4322.94,6416.31 4468.5,6416.3 4499.03,6385.77 D3.2@4499.03,6342.34 4507.62,6333.75 4540.34,6333.75 4548.21,6341.62 4548.21,6514.85 4563.96,6530.6 4749,6530.6 4804.71,6474.89 Q5.3@4804.71,6432.15
D+: D7.3 U17.4 USB1.6 USB1.8 | length 869.4
  Top Layer w10: U17.4@6523.59,4797.74 6650.02,4797.74 6716.92,4730.84 6745.69,4730.84 D7.3@6746.06,4731.21 6745.66,4731.61 6745.66,4752.1 6761.81,4768.24 USB1.6@6922.23,4768.24 6948.88,4768.24 6950.73,4766.4 7090.55,4766.4 7098.42,4774.27 v1(7098.42,4782.02) ; USB1.8@6922.23,4807.61 6948.88,4807.61 6950.73,4805.77 6990.98,4805.77 7004.75,4819.54 7016.37,4819.54 7030.03,4833.2 v1(7047.24,4833.2)
  Bottom Layer w10: v1(7047.24,4833.2) 7076.76,4833.2 7098.42,4811.55 v1(7098.42,4782.02)
D-: D7.2 U17.5 USB1.5 USB1.7 | length 872.5
  Top Layer w10: U17.5@6523.59,4817.44 6660.24,4817.44 6679.52,4798.16 6699.99,4798.16 6709.05,4807.22 6709.05,4817.85 6716.22,4825.02 D7.2@6746.06,4825.02 6746.06,4798.55 6756.69,4787.93 USB1.7@6922.23,4787.93 ; USB1.5@6922.2,4748.51 USB1.5@6924.7,4747.71 ; USB1.5@6922.23,4748.56 6948.88,4748.56 6950.73,4750.41 7087.01,4750.41 7090.55,4746.88 7090.55,4734.78 v1(7082.67,4726.9) ; USB1.7@6922.23,4787.93 6948.88,4787.93 6950.73,4789.78 6997.6,4789.78 7011.37,4803.56 7016.37,4803.56 7030.03,4789.89 v1(7055.11,4789.89)
  Bottom Layer w10: v1(7055.11,4789.89) 7055.11,4751.31 7079.52,4726.9 v1(7082.67,4726.9)
ENABLE: C3.2 R12.1 R28.2 RESET.2 U3.3 U18.2 | length 3237
  Top Layer w10: R28.2@6110.23,4566.78 6114.17,4570.71 v1(6114.17,4663.91) ; v1(6692.91,5152.1) RESET.2@6796.45,5152.1 ; U3.3@6781.68,6590.37 6781.68,6480.65 v1(6783.46,6478.86)
  Top Layer w27.56: R12.1@6603.64,6695.4 6647.28,6651.76 6781.68,6651.76 C3.2@6738.02,6695.43 U18.2@6738.02,6778.1 ; U3.3@6781.68,6590.38 6781.68,6651.37
  Bottom Layer w10: v1(6114.17,4663.91) 6114.17,5045.8 6220.47,5152.1 v1(6692.91,5152.1) 6692.91,5260.37 6710.62,5278.08 6803.14,5278.08 6901.57,5376.51 6901.57,5719.03 6811.02,5809.58 6811.02,6451.31 v1(6783.46,6478.86)
GND: BOOT.1 C1.1 C2.1 C3.1 C4.1 C5.2 C6.1 C7.1 C8.1 C9.2 C10.1 C11.1 C12.2 D7.1 LED1.2 LED2.1 MH1.1 MH2.1 MH3.1 MH4.1 pad.@6534.25,3788.32 pad.@6809.05,3248.95 Q1.2 Q2.2 Q3.2 Q4.2 Q5.2 Q6.2 Q7.2 Q8.2 R10.1 R11.1 R23.1 R24.1 R32.1 R33.1 RESET.1 RGB.3 U3.1 U3.40 U3.41 U3.42 U3.43 U3.44 U3.45 U3.46 U3.47 U3.48 U3.49 U10.2 U10.4 U10.6 U10.8 U11.2 U11.4 U11.6 U11.8 U15.3 U15.4 U16.3 U16.4 U17.3 U18.1 U20.4 U21.3 U22.2 U22.3 USB1.1 USB1.12 | length 8299.7
  Top Layer w10: U17.3@6523.59,4778.04 6559.05,4778.04 6579.11,4757.98 6579.11,4659.97
  Top Layer w19.68: v1(6826.76,4514.3) R32.1@6826.76,4556.32 ; R33.1@6826.76,4999.85 v1(6826.76,5049.73) ; v1(6842.51,4636.36) v1(6874.59,4636.36) 6890.33,4652.1 USB1.1@6922.23,4652.1 ; v1(6842.51,4919.82) v1(6874.59,4919.81) 6890.33,4904.07 USB1.12@6922.23,4904.07
  Top Layer w27.56: v1@6133.85,5738.71 6161.41,5738.71 6185.03,5762.34 6185.03,5799.55 C5.2@6187.2,5801.7 ; C7.1@6348.62,4986.7 v1(6348.62,5033.99) ; C8.1@6529.33,4986.7 v1(6610.23,4986.69) C6.1@6610.23,4917.6 ; v1(6539.36,4659.97) 6578.72,4659.97 6579.11,4659.58 6592.37,4659.58 ; 6592.37,4659.97 C4.1@6614.17,4681.78 ; C3.1@6695.11,6695.43 v1(6695.1,6737.32) U18.1@6695.15,6778.12 ; C2.1@6875.85,6695.07 C2.1@6875.85,6695.34 ; C1.1@6875.85,6777.67 v1(6875.85,6736.66) C2.1@6875.85,6695.34 ; U3.1@6881.68,6585.66 U3.1@6881.68,6590.77 6881.68,6684 ; C2.1@6881.68,6689.9 6881.68,6689.51 C2.1@6875.85,6695.34
  Top Layer w39.37: Q2.2@4901.96,5831.76 4923.41,5853.2 v1(4923.41,5888.47) ; Q5.2@4901.96,6469.55 4929.7,6497.3 v1(4929.71,6529.81) ; Q1.2@4901.96,7166.4 4923.02,7187.45 v1(4923.01,7223.9) ; Q6.2@4901.99,5075.9 4922.22,5096.13 v1(4922.23,5139.65) ; Q3.2@5079.13,7166.4 5110.23,7197.51 v1(5110.23,7222.96) ; Q4.2@5079.16,5831.76 5108.44,5861.04 v1@5108.44,5889.26 ; Q7.2@5079.16,6469.55 5111.59,6501.99 v1(5111.6,6530.2) ; Q8.2@5079.19,5075.87 5109.63,5106.31 v1(5109.63,5138.08) ; v1(5206.48,7222.33) 5206.48,7169.53 R10.1@5207.63,7168.37 ; v1(5206.87,6529.81) 5206.87,6472.28 R23.1@5207.63,6471.52 ; R24.1@5207.66,5077.85 v1(5208.84,5138.08) ; R11.1@5207.63,5833.73 v1@5208.44,5888.48 ; C10.1@5645.3,3348.91 5718.5,3349.31 v1(5748.1,3378.91) U21.3@5748.1,3473.61 ; C11.1@5696.84,3821.39 5698.03,3822.57 v1(5698.03,3886.74) ; RGB.3@5775.58,4998.55 v1(5775.58,5077.29) ; v1(6031.88,4246.19) 6031.88,4186.05 ; C9.2@6057.87,3348.95 6059.05,3347.77 v1(6186.61,3347.77) ; C12.2@6116.93,3821.39 6118.89,3823.36 v1(6230.7,3823.36) ; LED2.1@6533.21,3862.3 6534.24,3861.27 v1(6534.25,3788.32) ; U3.44@6632.86,6360.45 6850.08,6360.45 6877.94,6388.32 U3.1@6881.68,6590.77 ; U3.46@6632.86,6250.22 6850.4,6250.51 6881.7,6219.21 U3.40@6881.68,5901.79 6881.88,5901.59 v1(6881.88,5842.65) ; v1(6791.33,4911.94) 6791.3,4846.71 D7.1@6812.99,4825.02 ; LED1.2@6807.23,3337.28 6809.05,3335.46 v1(6809.05,3248.95) ; BOOT.1@7085.43,4404.07 7124.8,4404.11 v1(7124.8,4332.02) ; RESET.1@7085.43,5152.1 7125.98,5152.1 v1(7126.37,5226.9) ; 6031.88,4186.05 U22.3@5999.95,4154.11 5999.95,4120.75 6031.88,4152.69 6031.88,4186.05
  GND w39.37: v1(6791.33,4911.94) v1@6791.33,4915.88
  Bottom Layer w78.74: MH4.1@3156.3,3203.27 3174.41,3203.28 3255.91,3121.78 v2(5334.65,3121.78) ; MH2.1@3156.3,7418.22 3217.32,7418.23 4821.66,7418.23 v2(4925.2,7314.69)
  other v1: 6133.85,5738.71 5208.45,5888.47 5108.45,5889.26
  other v2: 6070.87,3094.22 6570.87,3109.97 5834.65,3125.72 5578.74,3145.4 4847.97,3287.13 5103.57,3334.38 4720.17,3354.06 7125.99,3401.31 6988.19,3413.12 4784.07,3515.48 5167.48,3515.48 6149.61,3519.42 4464.57,3554.85 6964.57,3566.66 7055.12,3657.21 5231.38,3716.27 4911.87,3791.07 4528.47,3865.87 6342.52,3889.5 5295.28,3940.68 5039.67,4035.16 4592.37,4050.91 6334.65,4102.09 4975.77,4192.64 4656.27,4194.46 7094.49,4228.08 5606.3,4318.63 5370.08,4358 4992.13,4365.87 5980.32,4365.87 4551.18,4373.75 6326.77,4385.56 7094.49,4503.67 4543.31,4539.1 5303.15,4554.85 4933.07,4558.79 5519.69,4582.41 5791.34,4594.22 5468.51,4838.31 5877.95,5011.54 7094.49,5015.48 6582.68,5054.85 6582.68,5212.33 4503.94,5243.83 6228.35,5251.7 4925.2,5255.64 4688.98,5259.57 5275.59,5267.45 5952.76,5291.07 5755.91,5369.81 5484.25,5436.74 6740.16,5684.77 5460.63,5688.71 5566.93,5917.06 5377.95,5968.24 4496.06,5980.05 4952.76,5983.98 5488.19,6137.53 5547.25,6373.75 5275.59,6641.47 4464.57,6665.09 4700.79,6665.09 4952.76,6665.09 6149.61,6669.02 6106.3,6822.57 5566.93,6980.05 5925.2,7011.54 6307.09,7180.84 6700.79,7180.84 7094.49,7259.58 4507.87,7306.82 4700.79,7310.76 5047.25,7310.76 6838.58,7310.76 5263.78,7314.69 6157.48,7314.69 6484.25,7314.69 5566.93,7318.63 5870.08,7322.57 6574.81,7472.17 6830.71,7480.05 4507.87,7491.86
GPIO0: BOOT.2 C5.1 R13.1 R31.2 U3.27 | length 2728.8
  Top Layer w10: v1(5992.12,4561.55) 5992.12,5116.67 6086.61,5211.16 6086.61,5589.11 6232.28,5734.78 6232.28,5799.54 C5.1@6230.11,5801.7 ; R13.1@6099.72,5801.71 6098.42,5803 6098.42,5845.01 6102.57,5849.16 6230.11,5849.16 ; C5.1@6230.11,5801.31 C5.1@6230.11,5801.7 ; U3.27@6230.11,5899.83 6230.11,5849.16 ; U3.27@6230.11,5900.23 U3.27@6231.68,5901.79 ; v1(6519.68,4561.55) 6518.38,4562.84 R31.2@6468.5,4562.85 6465.85,4565.49 6429.13,4565.49 6425.19,4561.55 6425.19,4478.87 6500,4404.07 BOOT.2@6796.45,4404.07 ; C5.1@6230.11,5801.7 6230.11,5849.16
  Bottom Layer w10: v1(5992.12,4561.55) v1(6519.68,4561.55)
GPIO1: U3.39 U13.1 | length 389.2
  Top Layer w10: U3.39@6831.68,5901.79 6835.82,5897.66 U13.1@6835.82,5514.3
GPIO2: U3.38 U13.2 | length 406.5
  Top Layer w10: U13.2@6735.82,5514.3 6781.68,5560.16 U3.38@6781.68,5901.79
GPIO3: U3.15 U14.1 | length 490.3
  Top Layer w10: U14.1@5795.27,6772.96 6046.95,6521.29 U3.15@6181.29,6521.28
GPIO4: pad.@5429.13,7167.84 R8.2 U3.4 | length 2025.1
  Top Layer w10: R8.2@5325.73,7168.37 5428.6,7168.37 v1(5429.13,7167.84) ; U3.4@6731.68,6590.77 6732.28,6590.17 v1(6732.28,6545.79)
  Bottom Layer w10: v1(5429.13,7167.84) 6006.29,7167.84 6046.45,7127.69 6046.45,6589.11 6089.76,6545.8 v1(6732.28,6545.79)
GPIO5: pad.@5434.04,6491.23 R21.2 U3.5 | length 2103
  Top Layer w10: R21.2@5321.83,6491.21 v1(5434.04,6491.23) ; v1(6681.1,6514.3) 6681.1,6590.18 U3.5@6681.68,6590.77
  Bottom Layer w10: v1(5434.04,6491.23) 5546.5,6603.69 5546.5,6872.62 5572.8,6898.91 5967.3,6898.91 5986.6,6879.61 5986.6,6569.81 6041.7,6514.71 v1(6681.1,6514.3)
GPIO6: pad.@5434.04,5833.75 R9.2 U3.6 | length 2345.4
  Top Layer w10: R9.2@5325.75,5833.76 v1(5434.04,5833.75) ; v1(6629.91,6478.86) 6629.91,6589 U3.6@6631.68,6590.77
  Bottom Layer w10: pad.@5434,5833.71 5477.9,5833.21 5726,5585.21 5831.5,5585.21 5881.5,5635.21 5881.5,6413.11 5947.2,6478.91 v1(6629.91,6478.86)
GPIO7: pad.@5434.04,5077.84 R22.2 U3.7 | length 2455.1
  Top Layer w10: R22.2@5325.76,5077.45 5326.15,5077.85 v1(5434.04,5077.84) ; U3.7@6581.68,6590.77 6582.67,6589.78 v1(6582.67,6435.56)
  Bottom Layer w10: v1(5434.04,5077.84) 5442.9,5086.7 5442.9,5164.32 5914.6,5635.91 5914.6,6378.11 5970.5,6433.61 6580.7,6433.61 v1@6582.7,6435.51
GPIO8: U3.12 U12.5 | length 426.5
  Top Layer w10: U3.12@6331.68,6590.77 6331.68,6802.68 6443.3,6914.3 U12.5@6443.3,6970.99